# EAGLE board BIXS-V1.5 (EAGLE 9.6.2)
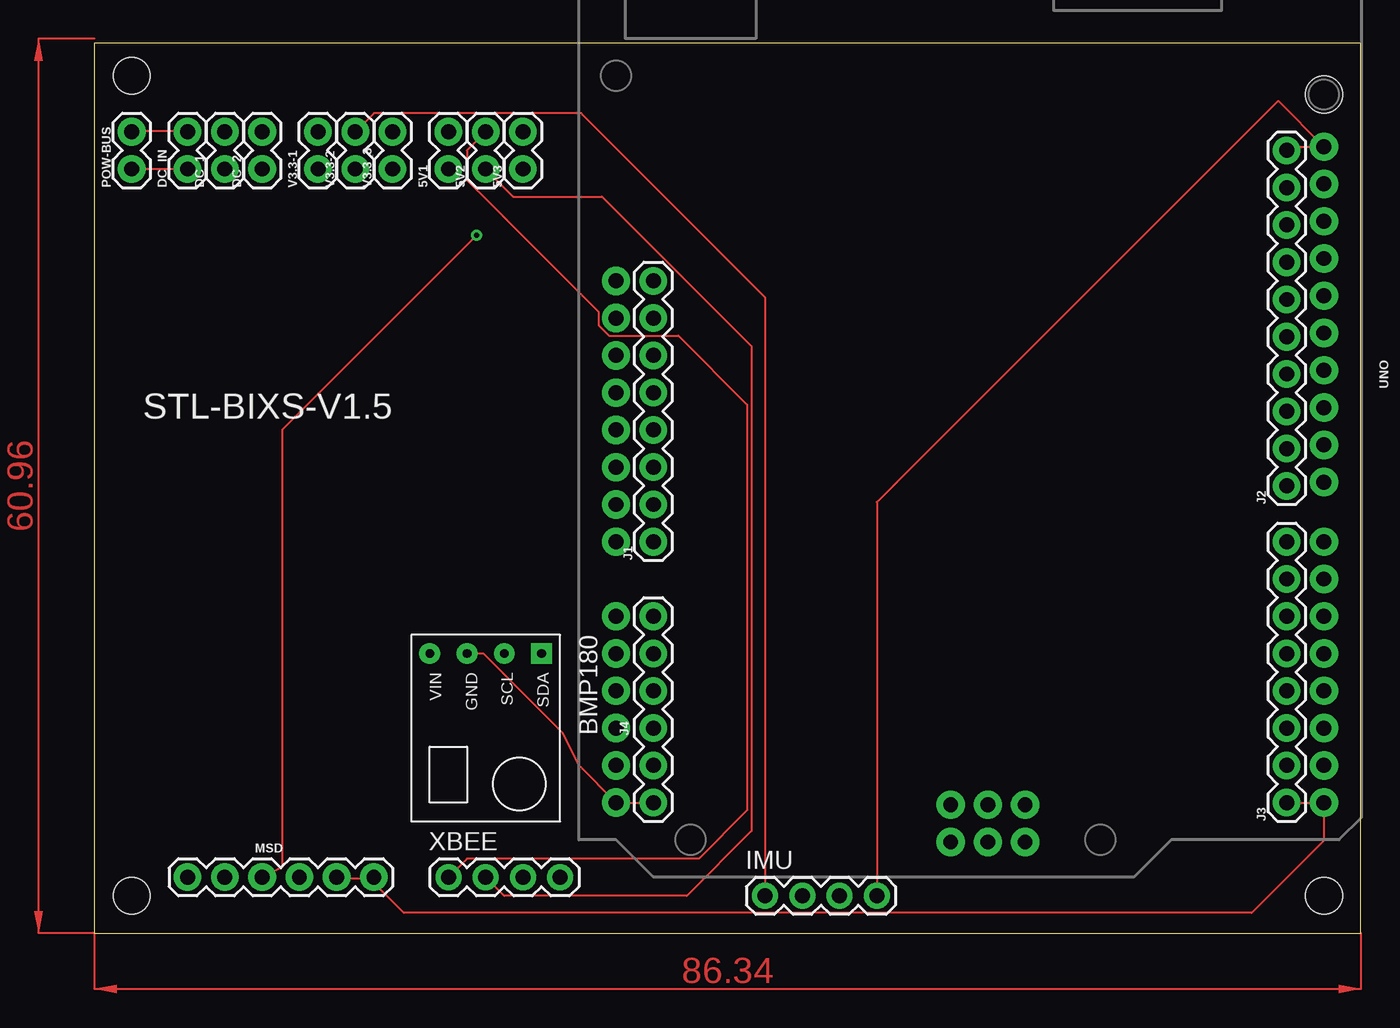
[diagram p0: board, top side]
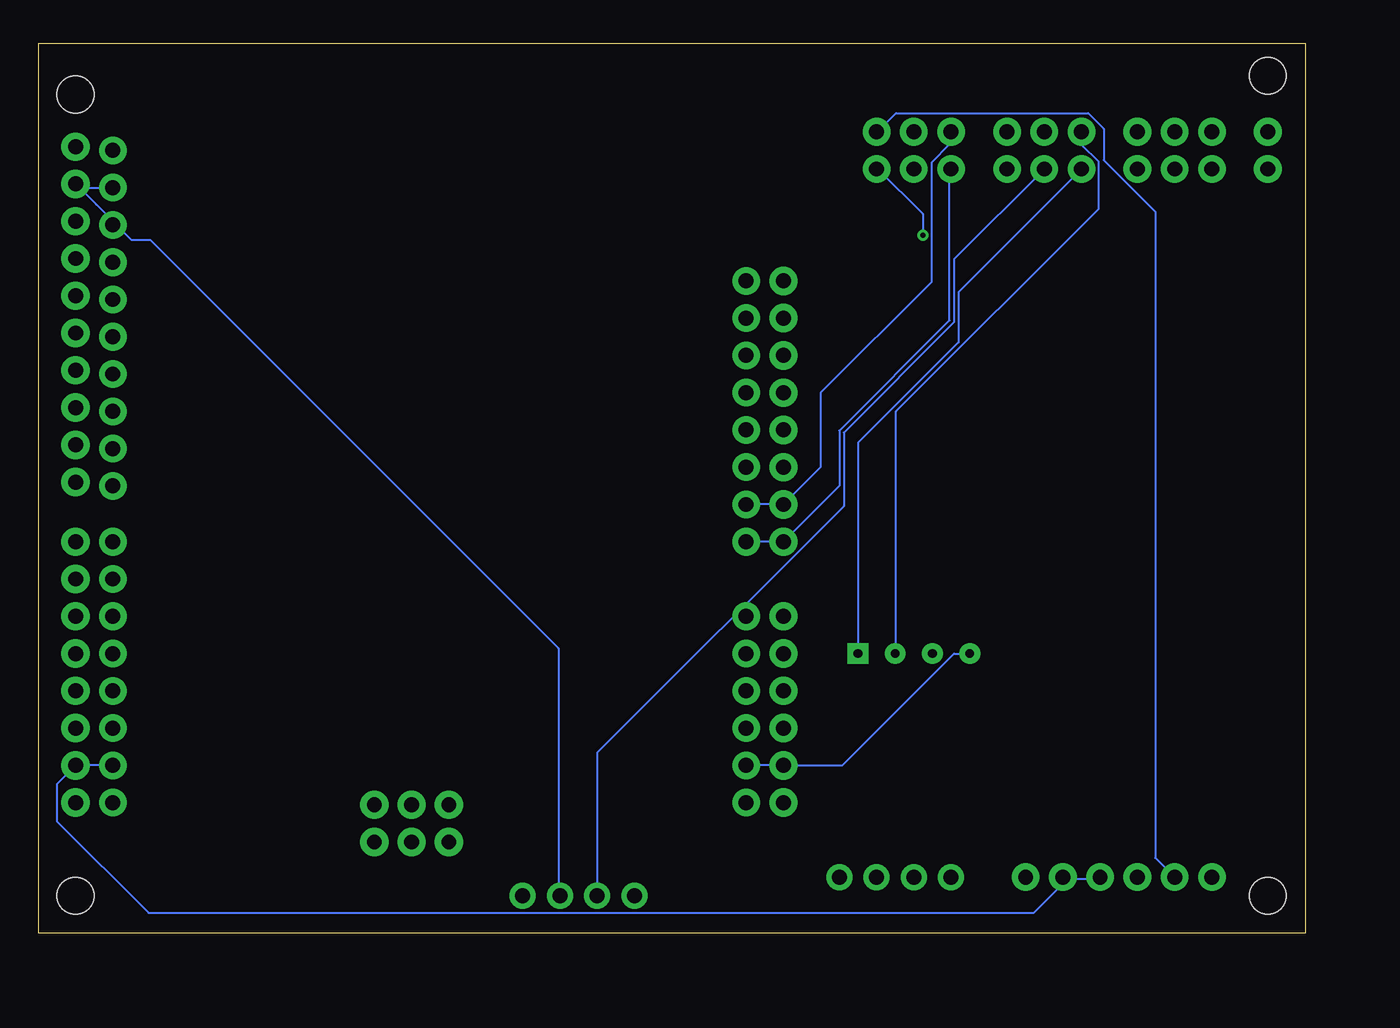
[diagram p1: board, bottom side, seen from below]

Size 86.34 x 60.63 mm. Coordinates in mm from the lower left corner, seen from the top.
Outline: 0,0 86.34,0 86.34,60.63 0,60.63 0,0
Copper layers (1*16): Top 0.035mm / dielectric 1.5mm / Bottom 0.035mm
Design rules "default": minimum track width 6mil, minimum drill 0.35mm, track to track 6mil, track to pad 6mil, pad to pad 6mil, via to via 6mil, smd to smd 6mil, copper to edge 40mil, drill to drill 6mil, minimum pad ring 10mil, minimum via ring 8mil, stop-mask expansion 4mil, vias tented up to drill 0mil, thermal gap 10mil
Holes 2.5 mm at 83.82,2.54 2.54,2.54 2.54,58.42 83.82,57.15

## Footprints (pad centres in the part's own frame; a part is rotated, then mirrored left to right if it is on the bottom)
1X02 = drill 1.016 pad 1.88: 1 0,0; 2 2.54,0
BMP180 = drill 0.6 pad 1.422: GND 0,0; SCL 0,-2.54; SDA 0,-5.08 | drill 0.6 pad 1.422 square: VIN 0,2.54
1X04-BIG = drill 1.016 pad 1.778: GND 0,0; SCL 7.62,0; SDA 5.08,0; VCC 2.54,0
1X08 = drill 1.016 pad 1.88: 1 0,0; 2 2.54,0; 3 5.08,0; 4 7.62,0; 5 10.16,0; 6 12.7,0; 7 15.24,0; 8 17.78,0
1X10 = drill 1.016 pad 1.88: 1 0,0; 2 2.54,0; 3 5.08,0; 4 7.62,0; 5 10.16,0; 6 12.7,0; 7 15.24,0; 8 17.78,0; 9 20.32,0; 10 22.86,0
FTDI_BASIC = drill 1.016 pad 1.88: CTS 10.16,0; DTR 0,0; GND 12.7,0; RXI 2.54,0; TXO 5.08,0; VCC 7.62,0
ARDUINO_R3_NO_HOLES = drill 1.016 pad 1.93: 3.3V 1.27,-24.13; 5V 3.81,-24.13; A0 16.51,-24.13; A1 19.05,-24.13; A2 21.59,-24.13; A3 24.13,-24.13; A4 26.67,-24.13; A5 29.21,-24.13; AREF -10.414,24.13; D0 29.21,24.13; D1 26.67,24.13; D2 24.13,24.13; D3 21.59,24.13; D4 19.05,24.13; D5 16.51,24.13; D6 13.97,24.13; D7 11.43,24.13; D8 7.366,24.13; D9 4.826,24.13; D10 2.286,24.13; D11 -0.254,24.13; D12 -2.794,24.13; D13 -5.334,24.13; GND@1 6.35,-24.13; GND@2 8.89,-24.13; GND@3 -7.874,24.13; GND@4 31.89,-1.32; IOREF -3.81,-24.13; MISO 29.35,3.76; MOSI 31.89,1.22; NC -6.35,-24.13; RESET@1 -1.27,-24.13; RESET@2 29.35,-1.32; SCK 29.35,1.22; SCL -15.494,24.13; SDA -12.954,24.13; VCC 31.89,3.76; VIN 11.43,-24.13

## Placement (x,y rotation side)
5V1  [1X02]  24.13,52.07 90 top
5V2  [1X02]  26.67,52.07 90 top
5V3  [1X02]  29.21,52.07 90 top
BMP1  BMP180  [BMP180]  27.94,19.05 270 top
DC_1  [1X02]  8.89,52.07 90 top
DC_2  [1X02]  11.43,52.07 90 top
DC_IN  DC-IN  [1X02]  6.35,52.07 90 top
IMU  1X4-BIG  [1X04-BIG]  45.72,2.54 0 top
J1  [1X08]  38.1,26.67 90 top
J2  [1X10]  81.28,30.48 90 top
J3  [1X08]  81.28,8.89 90 top
J4  6_PIN_SERIAL_CABLEPTH  [FTDI_BASIC]  38.1,8.89 90 top
MSD  6_PIN_SERIAL_CABLEPTH  [FTDI_BASIC]  6.35,3.81 0 top
POW-BUS  [1X02]  2.54,52.07 90 top
UNO  ARDUINO_UNO_R3NO_HOLES  [ARDUINO_R3_NO_HOLES]  59.69,38.1 270 top
V3.3-1  [1X02]  15.24,52.07 90 top
V3.3-2  [1X02]  17.78,52.07 90 top
V3.3_3  [1X02]  20.32,52.07 90 top
XBEE  1X4-BIG  [1X04-BIG]  24.13,3.81 0 top

## Library data of the parts
5V1-5V3 DC_1 DC_2 DC_IN J4 MSD POW-BUS V3.3-1 V3.3-2 V3.3_3 = SparkFun-Connectors
BMP1 = BMP180
IMU XBEE = adafruit
J1 J3 = SparkFun-Connectors; PROD_ID: CONN-08438
J2 = SparkFun-Connectors; PROD_ID: CONN-11563
UNO = SparkFun-Boards

## Nets
3.3-1: BMP1.VIN V3.3-1.1
3V-2: IMU.VCC V3.3-2.1
5V-2: 5V2.1 XBEE.VCC
5V-3: 5V3.1 MSD.TXO
5VIN: 5V1.1 J1.1 UNO.VIN
ARD_GND: 5V1.2 J1.2 UNO.GND@2
BLK: MSD.DTR
GND: DC_IN.2 POW-BUS.2
GND-3-1: BMP1.GND V3.3-1.2
GND-3-2: IMU.GND V3.3-2.2
GND-5-2: 5V2.2 XBEE.GND
GND-5-3: 5V3.2 MSD.RXI
GRN: MSD.GND
RX: XBEE.SCL
RXI: J3.1 MSD.CTS UNO.D0
SCL-1: BMP1.SCL J4.DTR UNO.A5
SCL-2: IMU.SCL J2.10 UNO.SCL
SDA-1: BMP1.SDA J4.RXI UNO.A4
SDA-2: IMU.SDA J2.9 UNO.SDA
TX: XBEE.SDA
TXU: J3.2 MSD.VCC UNO.D1
VCC: DC_IN.1 POW-BUS.1

## Tracks (layer width: path | path; a pad name or v marks a point on that pad's centre or on a via)
3.3-1
  Bottom 0.152: BMP1.VIN 30.48,33.4 23.62,40.26 23.62,43.69 V3.3-1.1
3V-2
  Bottom 0.152: 48.16,2.54 IMU.VCC 48.26,12.28 31.45,29.1 31.45,34.11 23.93,41.63 23.93,45.92 V3.3-2.1
5V-2
  Top 0.152: XBEE.VCC 27.94,2.54 40.39,2.54 44.81,6.96 44.81,39.98 34.59,50.19 28.55,50.19 5V2.1
5V-3  (via drill 0.35)
  Top 0.152: v26.06,47.55 12.8,34.29 12.8,4.5 MSD.TXO
  Bottom 0.152: v26.06,47.55 26.06,49.02 29.11,52.07 5V3.1
5VIN
  Bottom 0.152: 5V1.1 24.23,52.07 24.23,41.76 31.75,34.24 31.75,30.48 UNO.VIN J1.1
ARD_GND
  Bottom 0.152: 5V1.2 24.23,54.51 24.23,53.75 25.45,52.53 25.45,44.4 33.02,36.83 33.02,31.75 UNO.GND@2 J1.2
GND
  Top 0.152: POW-BUS.2 2.59,54.66 6.25,54.66 DC_IN.2
GND-3-1
  Bottom 0.152: BMP1.GND 27.89,19.05 27.89,35.56 14.07,49.38 14.07,52.55 15.24,53.72 15.24,54.51 V3.3-1.2
GND-3-2
  Top 0.152: IMU.GND 45.72,43.33 33.17,55.88 19.05,55.88 V3.3-2.2
GND-5-2
  Top 0.152: XBEE.GND 25.4,5.08 41.2,5.08 44.5,8.38 44.5,36.02 39.8,40.72 35.07,40.72 34.37,41.42 34.37,42.34 25.4,51.31 25.4,53.34 5V2.2
GND-5-3
  Bottom 0.152: MSD.RXI 10.21,5.13 10.21,49.17 13.72,52.68 13.72,54.81 14.78,55.88 27.89,55.88 29.11,54.66 5V3.2
RXI
  Top 0.152: MSD.CTS 16.56,3.71 18.75,3.71 21.08,1.37 78.89,1.37 83.82,6.3 UNO.D0 J3.1
SCL-1
  Top 0.152: BMP1.SCL 26.52,19.05 31.9,13.66 33.02,11.43 UNO.A5 J4.DTR
SCL-2
  Top 0.152: IMU.SCL 53.34,29.36 80.7,56.72 UNO.SCL 81.53,53.59 J2.10
SDA-1
  Bottom 0.152: BMP1.SDA 23.93,19.05 31.55,11.43 UNO.A4 J4.RXI
SDA-2
  Bottom 0.152: 82.42,49.66 UNO.SDA 83.57,50.8 J2.9 | 82.42,49.66 80.01,47.24 78.74,47.24 50.9,19.41 50.9,2.54 IMU.SDA | 82.42,49.66
TXU
  Bottom 0.152: MSD.VCC 13.97,3.71 16.15,3.71 18.49,1.37 78.84,1.37 85.09,7.62 85.09,10.16 UNO.D1 J3.2
VCC
  Top 0.152: DC_IN.1 POW-BUS.1
(copper drawn outside any net)
  shapes: Top area x2

## Text on the board
tNames: STL-BIXS-V1.5